# EAGLE board CD_Cap_brd_pnl_lck (EAGLE 7.6.0)
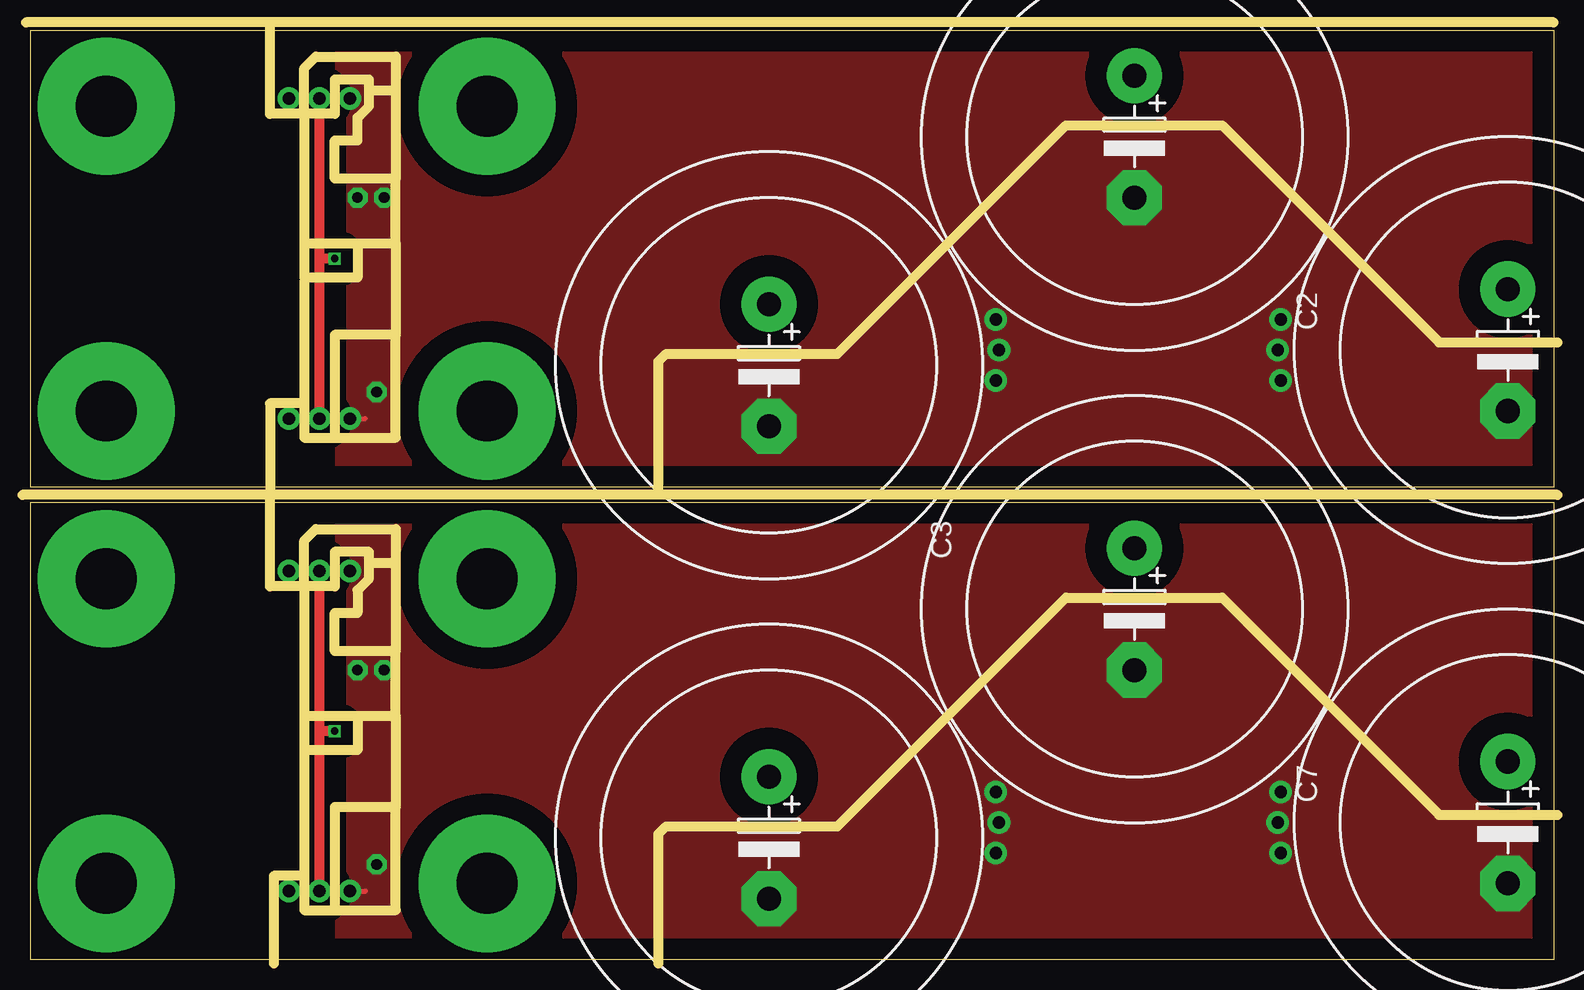
[diagram p0: board, top side]
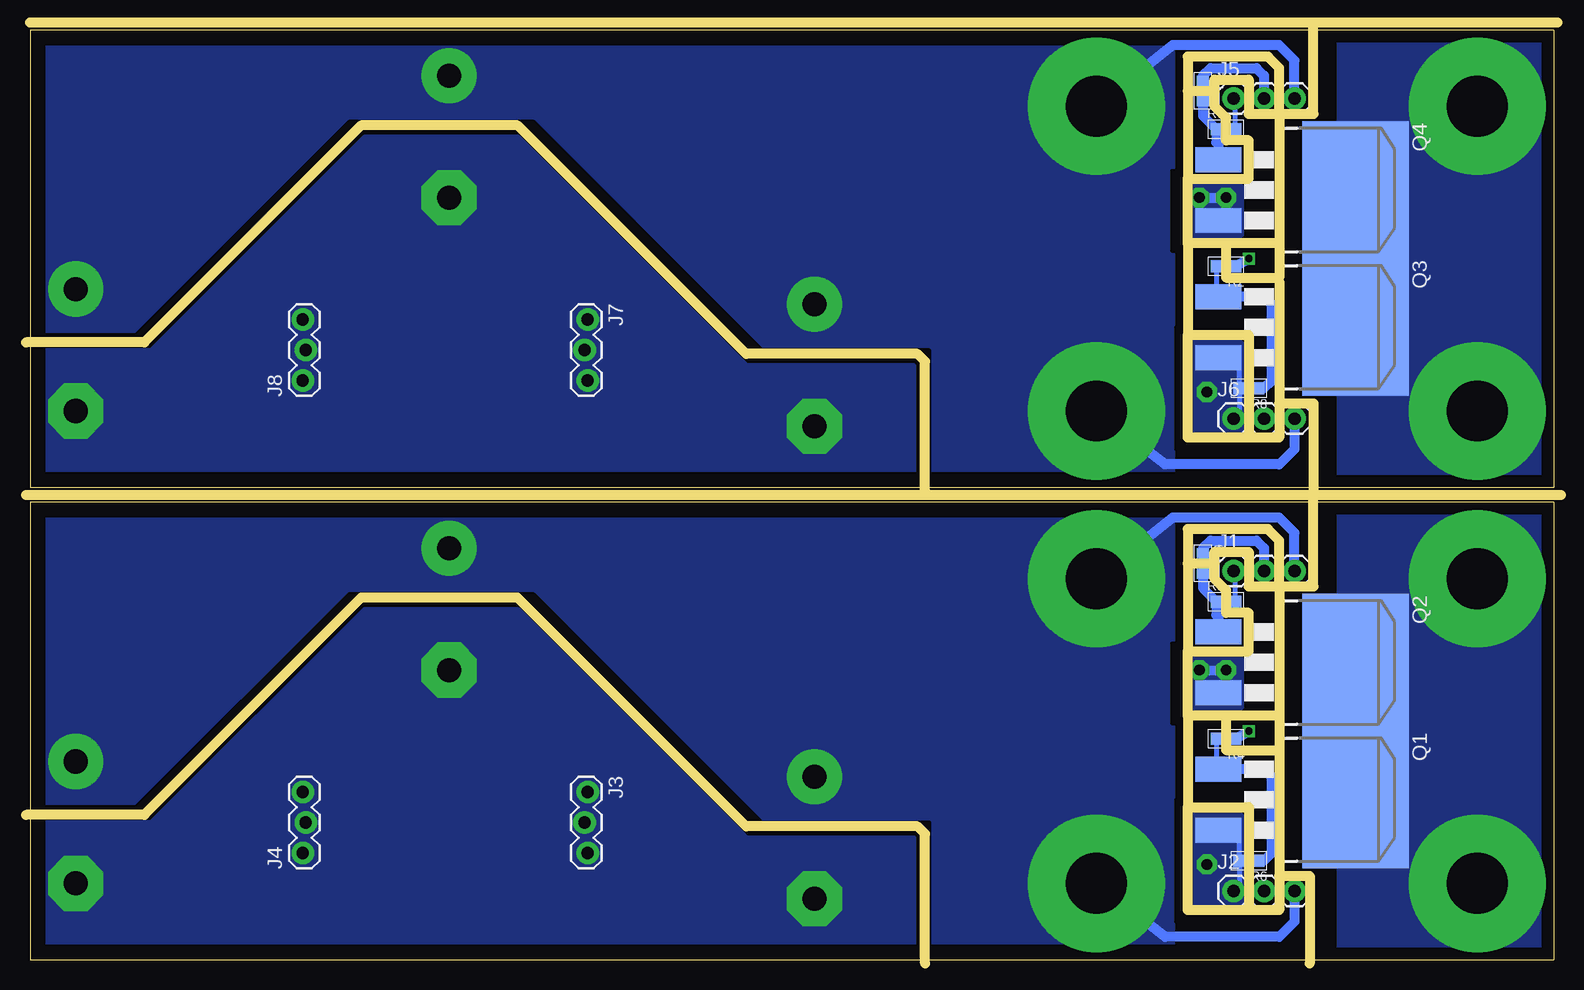
[diagram p1: board, bottom side, seen from below]

Size 127 x 77.47 mm. Coordinates in mm from the lower left corner, seen from the top.
Outline: 127,0 0,0 0,38.1 127,38.1 127,0
Outline: 127,39.37 0,39.37 0,77.47 127,77.47 127,39.37
Copper layers (1*16): Top 0.035mm / dielectric 1.5mm / Bottom 0.035mm
Design rules "default": minimum track width 10mil, minimum drill 24mil, track to track 8mil, track to pad 8mil, pad to pad 8mil, via to via 8mil, smd to smd 8mil, copper to edge 40mil, drill to drill 8mil, minimum pad ring 10mil, minimum via ring 8mil, stop-mask expansion 4mil, vias tented up to drill 0mil, thermal gap 10mil
Milling: 86 lines

## Footprints (pad centres in the part's own frame; a part is rotated, then mirrored left to right if it is on the bottom)
EB35D = drill 2.007 pad 4.597: + -5.08,0 | drill 2.007 pad 4.597 octagon: - 5.08,0
1X03 = drill 1.016 pad 1.88: 1 0,0; 2 2.54,0; 3 5.08,0
1X03_LOCK = drill 1.016 pad 1.88: 1 0,0.127; 2 2.54,-0.127; 3 5.08,0.127
D2PACK = smd 2.083 x 3.81: 1 -2.54,-8.89; 3 2.54,-8.89 | smd 11.43 x 8.89: 2 0,2.54
R0603-N = smd 0.95 x 1: 1 -0.8,0; 2 0.8,0
M6_PINHEAD = drill 5.08 pad 11.43: P$1 0,0

## Placement (x,y rotation side)
C1  [EB35D]  123.19,50.8 270 top
C2  [EB35D]  92.08,68.58 270 top
C3  [EB35D]  61.59,49.53 270 top
C6  [EB35D]  123.19,11.43 270 top
C7  [EB35D]  92.08,29.21 270 top
C8  [EB35D]  61.59,10.16 270 top
J1  [1X03]  26.67,32.38 0 bottom
J2  [1X03]  26.67,5.71 0 bottom
J3  [1X03_LOCK]  80.64,13.97 270 bottom
J4  [1X03_LOCK]  104.14,8.89 90 bottom
J5  [1X03]  26.67,71.75 0 bottom
J6  [1X03]  26.67,45.09 0 bottom
J7  [1X03_LOCK]  80.64,53.34 270 bottom
J8  [1X03_LOCK]  104.14,48.26 90 bottom
Q1  IRF3704S  [D2PACK]  19.05,13.34 270 bottom
Q2  IRF3704S  [D2PACK]  19.05,24.77 270 bottom
Q3  IRF3704S  [D2PACK]  19.05,52.7 270 bottom
Q4  IRF3704S  [D2PACK]  19.05,64.14 270 bottom
R1  100  [R0603-N]  29.21,72.39 270 bottom
R2  100  [R0603-N]  27.3,57.78 180 bottom
R3  100  [R0603-N]  29.21,33.02 270 bottom
R4  100  [R0603-N]  27.3,18.41 180 bottom
R5  10k  [R0603-N]  27.3,29.84 0 bottom
R6  10k  [R0603-N]  25.4,8.26 180 bottom
R7  10k  [R0603-N]  27.3,69.22 0 bottom
R8  10k  [R0603-N]  25.4,47.62 180 bottom
U$1  BIG_PINHEADX110-32  [M6_PINHEAD]  38.1,31.75 0 bottom
U$2  BIG_PINHEADX110-32  [M6_PINHEAD]  38.1,6.35 0 bottom
U$3  BIG_PINHEADX110-32  [M6_PINHEAD]  6.35,31.75 0 bottom
U$4  BIG_PINHEADX110-32  [M6_PINHEAD]  6.35,6.35 0 bottom
U$5  BIG_PINHEADX110-32  [M6_PINHEAD]  38.1,71.12 0 bottom
U$6  BIG_PINHEADX110-32  [M6_PINHEAD]  38.1,45.72 0 bottom
U$7  BIG_PINHEADX110-32  [M6_PINHEAD]  6.35,71.12 0 bottom
U$8  BIG_PINHEADX110-32  [M6_PINHEAD]  6.35,45.72 0 bottom

## Library data of the parts
C1-C3 C6-C8 = resistor
J1-J8 = SparkFun-Connectors
Q1-Q4 = transistor-power
R1-R8 = passives-7351
U$1-U$8 = _my-parts

## Nets
B+: C6.+ C7.+ C8.+ J1.3 J2.3 U$1.P$1 U$2.P$1
B+1: C1.+ C2.+ C3.+ J5.3 J6.3 U$5.P$1 U$6.P$1
B-: C6.- C7.- C8.- J1.1 J2.1 J3.1 J3.2 J3.3 J4.1 J4.2 J4.3 Q1.3 Q2.3 R5.2 R6.2
B-1: C1.- C2.- C3.- J5.1 J6.1 J7.1 J7.2 J7.3 J8.1 J8.2 J8.3 Q3.3 Q4.3 R7.2 R8.2
D: Q1.2 Q2.2 U$3.P$1 U$4.P$1
D1: Q3.2 Q4.2 U$7.P$1 U$8.P$1
N$1: Q1.1 R4.2 R6.1
N$3: Q4.1 R1.2 R7.1
N$4: Q2.1 R3.2 R5.1
N$5: Q3.1 R2.2 R8.1
TRIG: J1.2 J2.2 R3.1 R4.1
TRIG1: J5.2 J6.2 R1.1 R2.1

## Tracks (layer width: path | path; a pad name or v marks a point on that pad's centre or on a via)
B+
  Bottom 0.813: J2.3 21.59,3.17 22.86,1.91 32.38,1.91 U$2.P$1 | J1.3 21.59,35.56 22.86,36.83 31.75,36.83 U$1.P$1
  pour Bottom (isolate 1.27, rank 2, no thermals): 127,10.16 116.84,10.16 97.79,27.94 87.63,27.94 67.31,8.89 54.61,8.89 54.61,0 31.75,0 31.75,38.1 127,38.1
B+1
  Bottom 0.813: J6.3 21.59,42.55 22.86,41.27 32.38,41.27 U$6.P$1 | J5.3 21.59,74.93 22.86,76.2 31.75,76.2 U$5.P$1
  pour Bottom (isolate 1.27, rank 2, no thermals): 127,49.53 116.84,49.53 97.79,67.31 87.63,67.31 67.31,48.26 54.61,48.26 54.61,39.37 31.75,39.37 31.75,77.47 127,77.47
B-  (via drill 0.89 pad 1.68)
  Top 0.406: J2.1 27.94,5.71
  Bottom 0.406: J2.1 26.2,6.18 R6.2 26.2,10.32 26.67,10.79 Q1.3 | R5.2 26.5,32.22 J1.1
  Bottom 0.813: v29.53,24.13 27.62,24.13 27.3,23.81 v27.3,24.13 27.3,22.86 Q2.3
  other vias: 28.89,7.94
  pour Top (isolate 1.778, no thermals): 127,0 25.72,0.32 25.72,38.42 127,38.1
  pour Bottom (isolate 1.27, no thermals): 127,0 127,11.43 116.84,11.43 99.06,29.21 86.36,29.21 67.31,10.16 53.34,10.16 53.34,0
  pour Bottom (no thermals): 26.04,12.06 26.04,4.45 30.16,4.45 30.16,12.06
  pour Bottom (no thermals): 26.04,20.95 30.48,20.95 30.48,25.08 26.04,25.08
B-1  (via drill 0.89 pad 1.68)
  Top 0.406: J6.1 27.94,45.09
  Bottom 0.406: J6.1 26.2,45.55 R8.2 26.2,49.7 26.67,50.16 Q3.3 | R7.2 26.5,71.59 J5.1
  Bottom 0.813: v29.53,63.5 27.62,63.5 27.3,63.18 v27.3,63.5 27.3,62.23 Q4.3
  other vias: 28.89,47.31
  pour Top (isolate 1.778, no thermals): 127,39.37 25.72,39.69 25.72,77.79 127,77.47
  pour Bottom (isolate 1.27, no thermals): 127,39.37 127,50.8 116.84,50.8 99.06,68.58 86.36,68.58 67.31,49.53 53.34,49.53 53.34,39.37
  pour Bottom (no thermals): 26.04,51.44 26.04,43.81 30.16,43.81 30.16,51.44
  pour Bottom (no thermals): 26.04,60.33 30.48,60.33 30.48,64.45 26.04,64.45
D
  pour Bottom (no thermals): 0,38.1 0,0 17.78,0 17.78,38.1
D1
  pour Bottom (no thermals): 0,77.47 0,39.37 17.78,39.37 17.78,77.47
N$1
  Bottom 0.406: R4.2 28.11,16.04 Q1.1
  Bottom 0.813: R6.1 24.13,8.26 23.5,8.89 23.5,15.24 24.13,15.88 Q1.1
N$3
  Bottom 0.813: Q4.1 27.94,67.94 28.11,68.11 R7.1 29.21,70.32 R1.2
N$4
  Bottom 0.813: Q2.1 27.94,28.57 28.11,28.74 R5.1 29.21,30.95 R3.2
N$5
  Bottom 0.406: R2.2 28.11,55.41 Q3.1
  Bottom 0.813: R8.1 24.13,47.62 23.5,48.26 23.5,54.61 24.13,55.24 Q3.1
TRIG  (via drill 0.6)
  Top 0.813: J2.2 24.13,19.05 | 24.13,19.05 J1.2 | v25.4,19.05 24.13,19.05
  Bottom 0.813: R4.1 v25.4,19.05 | R3.1 29.21,34.29 28.57,34.92 24.77,34.92 24.13,34.29 J1.2
TRIG1  (via drill 0.6)
  Top 0.813: J6.2 24.13,58.42 | 24.13,58.42 J5.2 | v25.4,58.42 24.13,58.42
  Bottom 0.813: R2.1 v25.4,58.42 | R1.1 29.21,73.66 28.57,74.3 24.77,74.3 24.13,73.66 J5.2